# Altium PCB ina226.PcbDoc
Units mm, origin at the board's own origin, x right, y up, seen from the top; angles counter-clockwise.
Board outline 40 x 26 mm, 2 copper layers (Top Layer, Bottom Layer); 18 components, 13 nets, 70 pads, 8 vias.
Unrouted connection lines stored in the file: 2.
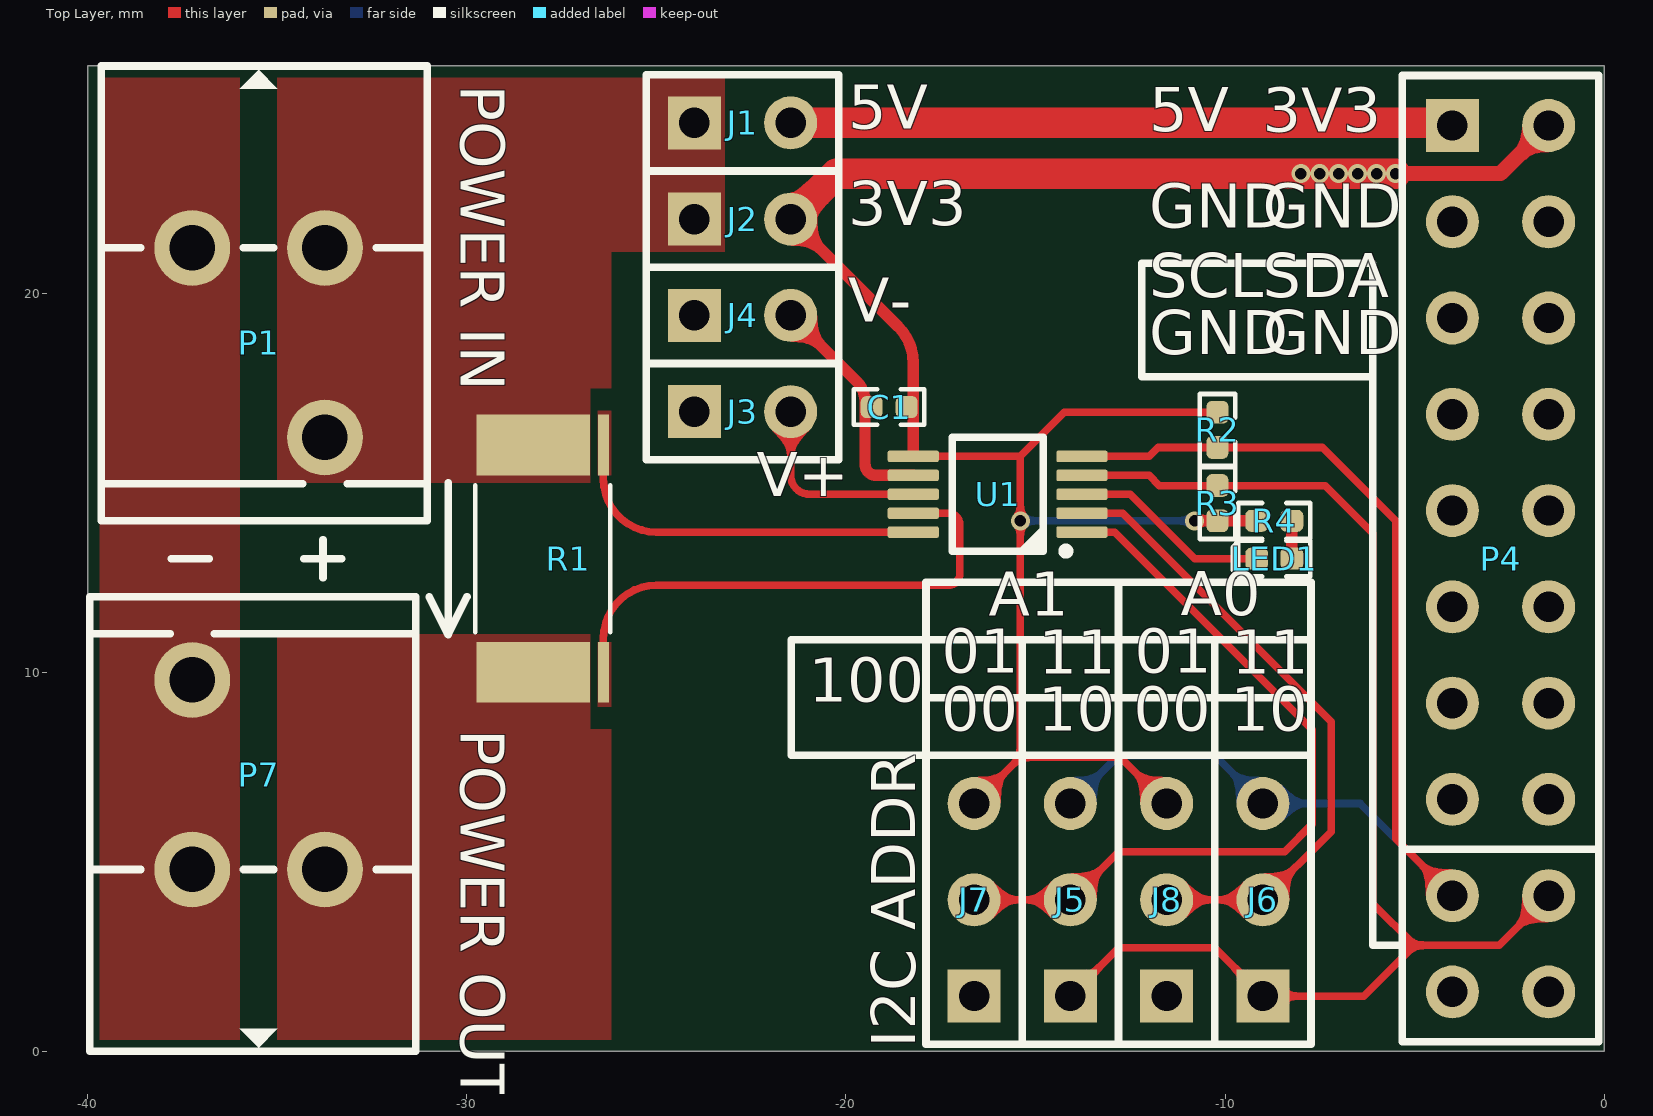
[diagram p0: Top Layer view]
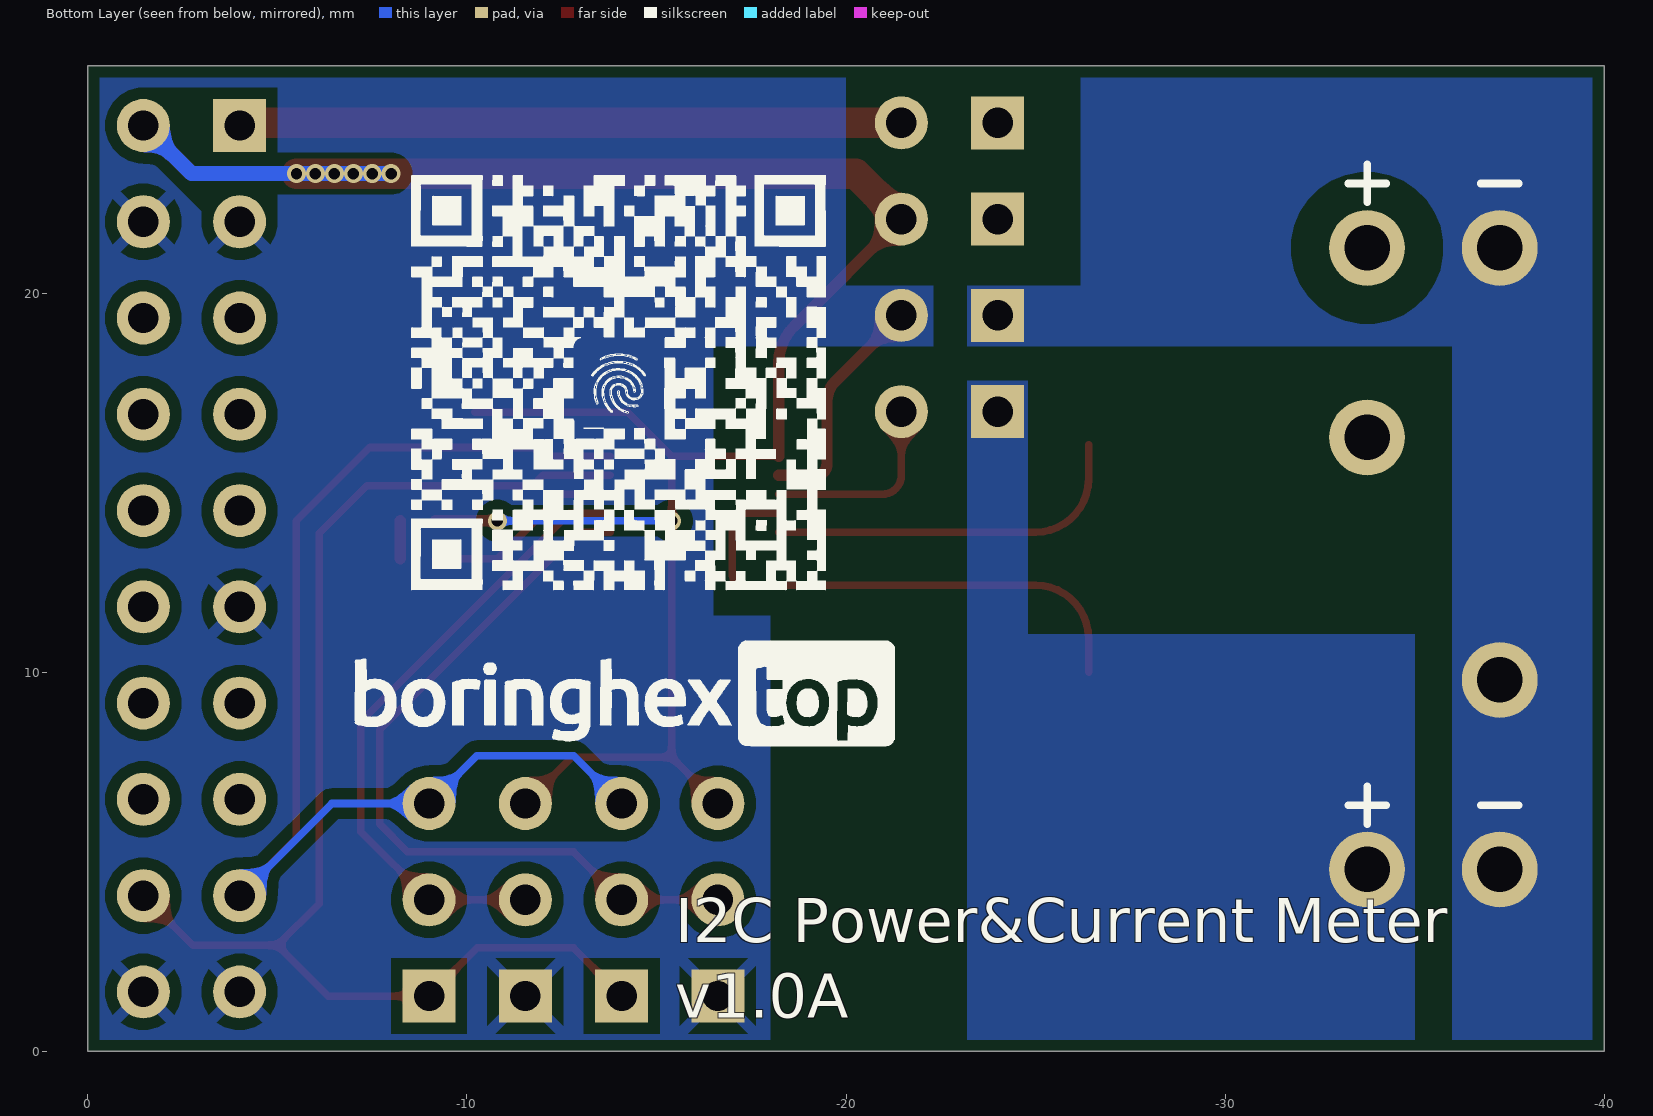
[diagram p1: Bottom Layer view, seen from below]
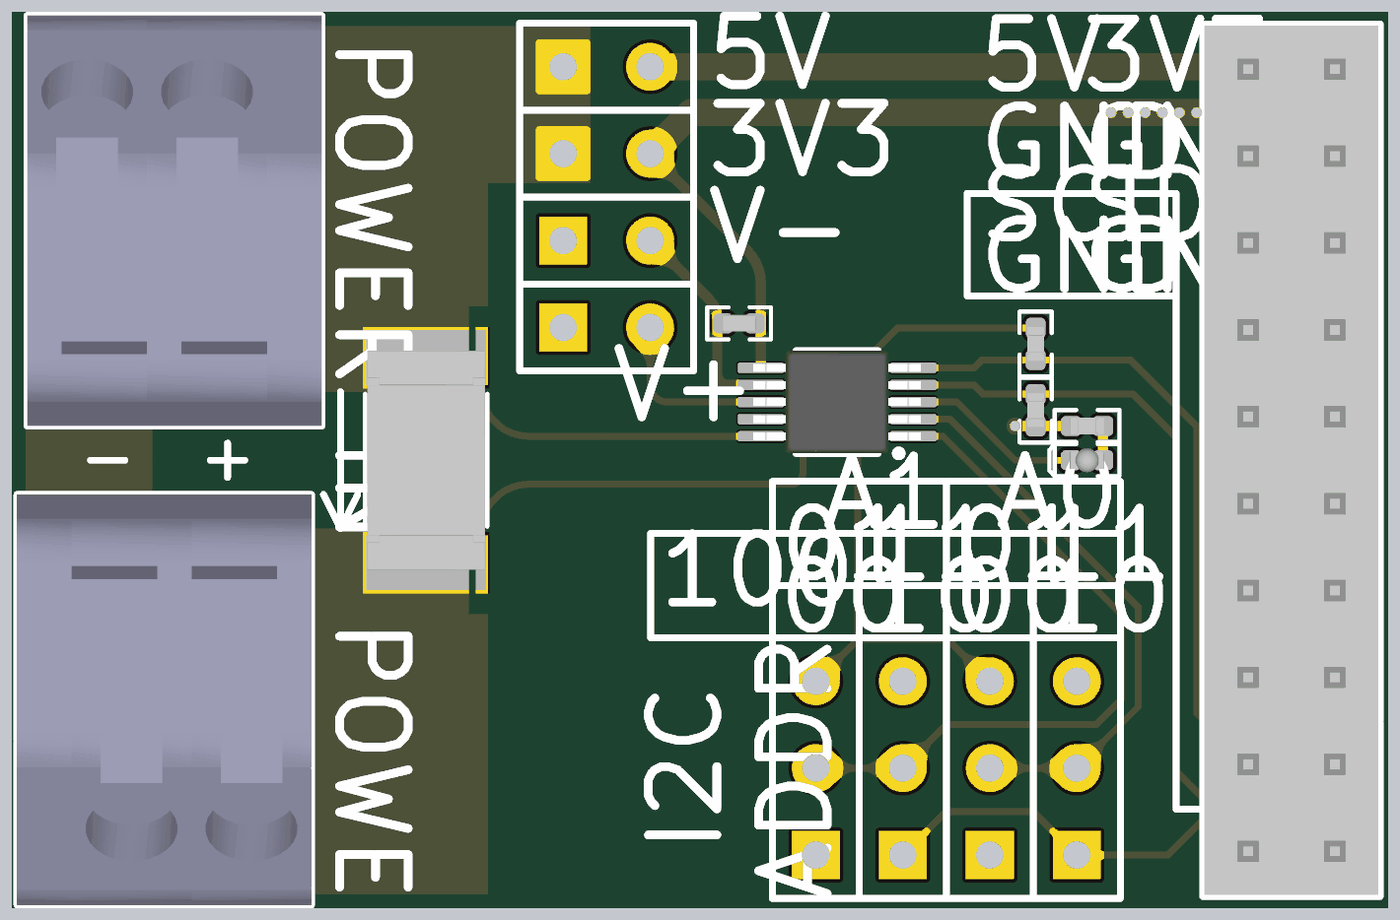
[diagram p2: 3D render of the assembled board from above, using the file's embedded part models]

## Layer stack, top to bottom
Top Solder: solder mask 0.0102, Solder Resist, Dk 3.5
Top Layer: signal copper 0.0356
Dielectric 1: dielectric 0.32, FR-4, Dk 4.8
Bottom Layer: signal copper 0.0356
Bottom Solder: solder mask 0.0102, Solder Resist, Dk 3.5

## Board outline
-40,0 -40,26 0,26 0,0

## Design rules (kind name [scope] priority, off if disabled: settings)
BoardOutlineClearance [All] p1: gap=0.3 ignorepadtopadclearanceinfootprint=FALSE
Clearance Clearance_2 [(ObjectKind = 'Pad') And (Layer = 'MultiLayer') And (Net = 'NetJ1_1') And (Component = 'Free')] p1: gap=1 ignorepadtopadclearanceinfootprint=FALSE
Clearance [All] p2: gap=0.2 ignorepadtopadclearanceinfootprint=FALSE except(0.3: Arc-Fill Arc-Poly Arc-Region Track-Fill Track-Poly Track-Region SMDPad-Fill SMDPad-Poly SMDPad-Region THPad-Fill THPad-Poly THPad-Region Via-Fill Via-Poly Via-Region Fill-Fill Fill-Poly Fill-Region Poly-Poly Poly-Region Region-Region)
PolygonConnect PolygonConnect_1 [(not InNet('GND')) or InComponent('J4')] p1: connectstyle=Direct reliefconductorwidth=0.254 reliefentries=4 polygonreliefangle="90 Angle" airgapwidth=0.254
PolygonConnect [All] p2: thpad.connectstyle=Relief thpad.reliefconductorwidth=0.3 thpad.reliefentries=4 thpad.polygonreliefangle="45 Angle" thpad.airgapwidth=0.3 smdpad.connectstyle=Relief smdpad.reliefconductorwidth=0.3 smdpad.reliefentries=4 smdpad.polygonreliefangle="90 Angle" smdpad.airgapwidth=0.3 via.connectstyle=Direct via.reliefconductorwidth=0.254 via.reliefentries=4 via.polygonreliefangle="90 Angle" via.airgapwidth=0.254
RoutingVias [All] p1: holewidth=0.3 width=0.5 viastyle="Through Hole" minholewidth=0.3 minwidth=0.5 maxholewidth=1.6 maxwidth=2
SolderMaskExpansion [All] p1: expansion=0.102 istentingtop=FALSE
Width [All] p1: maxlimit=10 minlimit=0.15 preferedwidth=0.3
30 further rules are at their usual default settings.

## Components (designator, comment, footprint, x,y, rotation, side; value= is the part's Value field where it differs from the comment)
C1 "100nF" CAPC100X50X55L25N -18.862,17 r0 top
J1 "5V" HDR1X2 -24,24.5 r0 top
J2 "3V3" HDR1X2 -24,21.96 r0 top
J3 "4WIRE VBUS" HDR1X2 -24,16.88 r0 top
J4 "4WIRE GND" HDR1X2 -24,19.42 r0 top
J5 "A1" HDR1X3 -14.08,1.46 r90 top
J6 "A0" HDR1X3 -9,1.46 r90 top
J7 "A1" HDR1X3 -16.62,1.46 r90 top
J8 "A0" HDR1X3 -11.54,1.46 r90 top
LED1 "蓝灯 正贴" LEDC100X50X45L25N -8.7,13 r0 top
P1 "PWR IN" CONN-TH_P3.50_KF250-3.5-2P-1 -35.5,18.7 r180 top
P4 "Header 10X2" HDRV20W63P254_10X2_2540X508H860 -4,24.43 r270 top
P7 "PWR OUT" CONN-TH_P3.50_KF250-3.5-2P-1 -35.5,7.3 r0 top
R1 "20m" RESC620X325X80L80N-K -28,13 r90 top
R2 "4k7" RESC100X50X35L25N -10.2,16.4 r90 top value=1K
R3 "4k7" RESC100X50X35L25N -10.2,14.465 r270 top value=1K
R4 "470" RESC100X50X35L25N -8.7,14 r180 top value=1K
U1 "INA226AIDGST" DGS0010A_N -16,14.7 r90 top

## Footprints (in the part's own frame and the unit in brackets; to place one, negate y for a bottom-side part, rotate by r counter-clockwise, add the part's x,y. Pads: shape width x height; smd on the part's side, far side on the other; paste and mask are expansions set on the pad)
CAPC100X50X55L25N [mm] "Capacitor, Chip; 1.00 mm L X 0.50 mm W X 0.55 mm H body"
  rrect50% 0.575x0.58 smd: 1(-0.462,0) 2(0.462,0)
  silkscreen extent -0.93,-0.47 0.93,0.47, body extent -0.5,-0.25 0.5,0.25, height 0.55
CONN-TH_P3.50_KF250-3.5-2P-1 [mm]
  round 2 hole 1.2: 1(-1.75,2.5) 2(1.75,-2.5)
  silkscreen extent -4.45,-7.3 4.15,4.7, body extent -4.45,-7.3 4.15,4.7, height 13.31
DGS0010A_N [mm] "SOP, 10-Leads, Body 3.1x3.1mm, Pitch 0.5mm, IPC Medium Density"
  rrect33% 0.3x1.35 smd mask+0.05: 1(-1,-2.225) 2(-0.5,-2.225) 3(0,-2.225) 4(0.5,-2.225) 5(1,-2.225) 6(1,2.225) 7(0.5,2.225) 8(0,2.225) 9(-0.5,2.225) 10(-1,2.225)
  silkscreen extent -1.6,-1.9 1.5,1.2, body extent -1.5,-2.45 1.5,2.45, height 0.94
HDR1X2 [mm] "Connector; Header; 2 Position"
  rect 1.4x1.4 hole 0.8: 1(0,0)
  round 1.4 hole 0.8: 2(2.54,0)
  silkscreen extent -1.27,-1.27 3.81,1.27
HDR1X3 [mm] "Connector; Header; 3 Position"
  rect 1.4x1.4 hole 0.8: 1(0,0)
  round 1.4 hole 0.8: 2(2.54,0) 3(5.08,0)
  silkscreen extent -1.27,-1.27 6.35,1.27
HDRV20W63P254_10X2_2540X508H860 [mm] "Header, Vertical Non-Shrouded, 2.54 mm pitch; 0.68 mm lead width, 20 pin, 2 rows, 25.40 mm L X 5.08 mm W X 8.70 mm H body"
  rect 1.4x1.4 hole 0.8 paste-1.65: 1(0,0)
  round 1.4 hole 0.8 paste-1.65: 2(0,2.54) 3(2.54,0) 4(2.54,2.54) 5(5.08,0) 6(5.08,2.54) 7(7.62,0) 8(7.62,2.54) 9(10.16,0) 10(10.16,2.54) 11(12.7,0) 12(12.7,2.54) 13(15.24,0) 14(15.24,2.54) 15(17.78,0) 16(17.78,2.54) 17(20.32,0) 18(20.32,2.54) 19(22.86,0) 20(22.86,2.54)
  silkscreen extent -1.32,-1.32 24.18,3.86, body extent -1.27,-1.27 24.13,3.81, height 8.7
LEDC100X50X45L25N [mm] "LED, Chip; 1.00 mm L X 0.50 mm W X 0.45 mm H body"
  rrect50% 0.6x0.58 smd: A(0.465,0) C(-0.465,0)
  silkscreen extent -1.1,-0.47 0.94,0.47, body extent -0.5,-0.35 0.5,0.35, height 0.8
RESC100X50X35L25N [mm] "Resistor, Chip; 1.00 mm L X 0.50 mm W X 0.35 mm H body"
  rrect50% 0.6x0.58 smd: 1(-0.465,0) 2(0.465,0)
  silkscreen extent -0.94,-0.47 0.94,0.47, body extent -0.5,-0.25 0.5,0.25, height 0.35
RESC620X325X80L80N-K [mm] "Resistor, Chip; 6.20 mm L X 3.25 mm W X 0.80 mm H body"
  rect 1.6x0.3 smd mask+0.102: 1(-3,-1.6) 2(3,-1.6)
  rect 1.6x3 smd mask+0.102: 1(-3,0.25) 2(3,0.25)
  silkscreen extent -1.94,-1.79 1.94,1.79, body extent -3.2,-1.73 3.2,1.73, height 0.8

## Part data
C1: library part "Cap Semi", "Capacitor (Semiconductor SIM Model)", LatestRevisionDate=29-May-2009, LatestRevisionNote="IPC-7351 Footprint Added.", PackageDescription="Chip Capacitor", PackageReference=C1206, Published=8-Jun-2000, Publisher="Altium Limited"
J1 J2 J3 J4 P1 P7: library part "Header 2", "Header, 2-Pin", LatestRevisionDate=17-Jul-2002, LatestRevisionNote="Re-released for DXP Platform.", Publisher="Altium Limited"
J5 J6 J7 J8: library part "Header 3", "Header, 3-Pin", LatestRevisionDate=17-Jul-2002, LatestRevisionNote="Re-released for DXP Platform.", Publisher="Altium Limited"
LED1: library part LED-SMD, "贴片LED", 编号=C965795
P4: "Header, 10-Pin, Dual row", 编号=C5116480
R1 R2 R3 R4: library part Res1, "Resistor", PackageDescription="Axial Device, Thru-Hole; 2 Leads; 0.3 in Pin Spacing"
  R2 R3 R4: LatestRevisionDate=17-Jul-2002, LatestRevisionNote="Re-released for DXP Platform.", PackageReference=AXIAL-0.3, Published=8-Jun-2000, Publisher="Altium Limited"
U1: library part CMP-0704-00057-2, "High-Side Measurement, Bi-Directional Current / Power Monitor with I2C Interface, 2.7 to 5.5 V, -40 to 125 degC, 10-pin SOP (DGS10), Green (RoHS & no Sb/Br)", Quiescent Current (+/-)(Typ)(mA)=0.33, Rating=Catalog, CMRR(Min)(dB)=126, Code_JEDEC=MO-153, Common Mode Range(Max)(V)=36, Common Mode Range(Min)(V)=0, ComponentLink1Description="Manufacturer URL", ComponentLink1URL=http://www.ti.com/, ComponentLink2Description=Datasheet, ComponentLink2URL=http://www.ti.com/general/docs/lit/getliterature.tsp?genericPartNumber=INA226&fileType=pdf, ComponentLink3Description="Package Specification", ComponentLink3URL=http://www.ti.com/lit/ml/mpds035b/mpds035b.pdf, DatasheetVersion=SBOS547, Eco-Plan="Green (RoHS & no Sb/Br)", Gain(V/V)=1, Input Offset (+/-)(Max)(uV)=10, Input Offset Drift (+/-)(Max)(uV/Degrees Celsius)=0.1, Mounting Technology="Surface Mount", PackageDescription="10-Pin Plastic Small Outline, Body 3 x 3 mm, Pitch 0.5 mm", PackageReference=DGS0010A, PackageVersion="4073272/C, 02/2004", PartNumber=INA226AIDGST, Small-Signal Bandwidth(Typ)(MHz)=0.007, SubFamily="Current Shunt Monitor", Vs(Max)(V)=5.5, Vs(Min)(V)=2.7

## Free pads (board coordinates)
  round 2 hole 1.2: 15(-37.25,4.8) 16(-33.75,21.2)

## Via types
v1: diameter 0.5, hole 0.3, Top Layer to Bottom Layer, tented both sides, 8 vias

## Nets (pads, with @x,y where several pads share a name; then routed paths per layer and width w, separated by ;. In a path a pad name is that pad's centre, name@x,y a point inside that pad or via, vN(x,y) a via of type N, cw(c..) or ccw(c..) an arc to the next point about the centre after c; other vN are vias at no path point)
3V3: C1.2 J2.2 J7.3 J8.3 P4.2 R2.2 R3.2 R4.2 U1.6 | length 66.4
  Top Layer w0.2: U1.6 -15.4,15.7 ; J7.3 -15.4,7.76 ; J8.3 -12.76,7.76 -15.4,7.76 ; R2.2 -14.235,16.865 -15.4,15.7 ; -15.4,7.76 v1(-15.4,14) -15.4,15.7
  Top Layer w0.3: J2.2 -18.62,19.12 ; -18.62,19.12 cw(c-19.569,18.168) -18.225,18.168 -18.225,17 U1.6 ; v1(-10.8,14) R3.2 R4.2
  Top Layer w0.4: v1(-7.5,23.16) v1(-7,23.16) v1(-6.5,23.16) v1(-6,23.16) v1(-5.5,23.16) -2.73,23.16 P4.2
  Top Layer w0.8: J2.2 -20.26,23.16 v1(-8,23.16) v1(-7.5,23.16) v1(-7,23.16) v1(-6.5,23.16) v1(-6,23.16) v1(-5.5,23.16)
  Bottom Layer w0.2: v1(-15.4,14) v1(-10.8,14)
  Bottom Layer w0.4: v1(-8,23.16) v1(-7.5,23.16) v1(-7,23.16) v1(-6.5,23.16) v1(-6,23.16) v1(-5.5,23.16) -2.73,23.16 P4.2
5V: J1.2 P4.1 | length 17.5
  Top Layer w0.8: J1.2 P4.1@-4,24.5
  Top Layer w1: P4.1 P4.1@-4,24.5
GND: C1.1 J4.2 J7.1 J8.1 P4.3 P4.4 P4.11 P4.19 P4.20 U1.7 | length 6.1
  Top Layer w0.3: J4.2 -19.714,17.674 cw(c-20.228,17.159) C1.1@-19.5,17.158 ; C1.1@-19.5,17.157 -19.5,15.5 ccw(c-19.2,15.5) -19.2,15.2 U1.7
NetJ1_1: J1.1 J2.1 P1.1 pad.16 R1.2 U1.10 | length 9.9
  Top Layer w0.2: R1.2@-26.4,16 -26.4,15.1 ccw(c-25,15.1) -25,13.7 U1.10
NetJ3_1: J3.1 P7.2 R1.1 U1.9 | length 14
  Top Layer w0.2: R1.1@-26.4,10 -26.4,10.9 cw(c-25,10.9) -25,12.3 -17.3,12.3 ccw(c-17.3,12.6) -17,12.6 -17,13.9 ccw(c-17.3,13.9) -17.3,14.2 U1.9
NetJ3_2: J3.2 U1.8 | length 5.2
  Top Layer w0.2: J3.2 -21.46,15.2 ccw(c-20.96,15.2) -20.96,14.7 U1.8
NetJ4_1: J4.1 P1.2 P7.1 pad.15
NetJ5_2: J5.2 J7.2 U1.1 | length 20.5
  Top Layer w0.2: J7.2 J5.2 -12.81,5.27 -8.43,5.27 -7.7,6 -7.7,8.49 -12.91,13.7 U1.1
NetJ6_2: J6.2 J8.2 U1.2 | length 16.8
  Top Layer w0.2: U1.2 -12.7,14.2 -7.2,8.7 -7.2,5.8 J6.2 J8.2
NetLED1_A: LED1.A R4.1 | length 1
  Top Layer w0.3: LED1.A R4.1
NetLED1_C: LED1.C U1.3 | length 5.3
  Top Layer w0.2: U1.3 -12.5,14.7 -10.8,13 LED1.C
SCL: J5.3 J6.3 P4.17 R2.1 U1.5 | length 31.8
  Top Layer w0.2: U1.5 -12,15.7 -11.765,15.935 R2.1 -7.435,15.935 -5.5,14 -5.5,5.61 P4.17
  Bottom Layer w0.2: J5.3 -12.82,7.8 -10.26,7.8 J6.3 -6.43,6.54 P4.17
SDA: J5.1 J6.1 P4.18 R3.1 U1.4 | length 34.4
  Top Layer w0.2: J5.1 -12.81,2.73 -10.27,2.73 J6.1 -6.34,1.46 -5,2.8 ; U1.4 -12,15.2 -11.73,14.93 R3.1 -7.36,14.93 -6.1,13.67 -6.1,3.9 -5,2.8 ; P4.18 -2.77,2.8 -5,2.8
pads on no net: P4.5 P4.6 P4.7 P4.8 P4.9 P4.10 P4.12 P4.13 P4.14 P4.15 P4.16

## Polygon pours and split planes (outlines as drawn)
NetJ4_1 on Top Layer "NONET_L-01_P-001" (solid, remove dead copper, pour order 4): -40,26 -36,26 -36,0 -40,0
NetJ3_1 on Top Layer "NONET_L-01_P-001" (solid, remove dead copper, pour order 1): -35,11 -26.2,11 -26.2,4.9 -26.2,0 -35,0
NetJ1_1 on Top Layer "NONET_L-01_P-001" (solid, remove dead copper, pour order 0): -35,15 -26.2,15 -26.2,21.1 -23.2,21.1 -23.2,26 -35,26
GND on Bottom Layer "NONET_L-01_P-001" (solid, remove dead copper, pour order 5): -22.3,20.2 -22.3,18.6 -16.5,18.6 -16.5,11.5 -18,11.5 -18,0 0,0 0,26 -20,26 -20,20.2
NetJ4_1 on Bottom Layer "NONET_L-01_P-001" (solid, remove dead copper, pour order 3): -40,0 -36,0 -36,18.6 -23.2,18.6 -23.2,20.2 -26.2,20.2 -26.2,26 -40,26
NetJ3_1 on Bottom Layer "NONET_L-01_P-001" (solid, remove dead copper, pour order 2): -24.8,17.7 -24.8,11 -35,11 -35,8.85 -35,0 -23.2,0 -23.2,17.7

## Other copper
Top Layer:
  pour cut-out: -26.55,10.8 -26.2,10.8 -26.2,11 -26.75,11 -26.75,8.5 -26.2,8.5 -26.2,9.1 -26.55,9.1 -26.55,9.2
  pour cut-out: -26.55,15.2 -26.2,15.2 -26.2,15 -26.75,15 -26.75,17.5 -26.2,17.5 -26.2,16.9 -26.55,16.9 -26.55,16.8
Bottom Layer:
  pour cut-out: -7.928,23.71 -5,23.71 -5,25.43 -1.46,25.43 -1.46,23.709 -3,22.169 -3,21.89 -5,21.89 -5,22.61 -7.928,22.61
  pour cut-out: -4.132,5.11 -5,5.11 -5,4.242 -4.132,4.242
  pour cut-out: -9,7.54 -9,5.54 -14.08,5.54 -14.08,7.54

## Silkscreen, mask and mechanical layers (free items; w line width, h text height)
Top Overlay:
  lines w0.2: -37.8,13 -36.8,13 ; -34.3,13 -33.3,13 ; -33.8,12.5 -33.8,13.5 ; -31,12 -30.5,11 ; -30.5,15 -30.5,11 ; -30,12 -30.5,11 ; -17.89,9.334 -7.73,9.334 ; -15.35,7.81 -15.35,10.858 ; -12.81,7.81 -12.81,12.382 ; -10.27,7.81 -10.27,10.858 ; -7.73,7.81 -7.73,12.382 -17.89,12.382 -17.89,7.81 -21.446,7.81 -21.446,10.858 -17.89,10.858 -7.73,10.858 ; -5.32,2.8 -6.1,2.8 -6.1,17.8 ; -5.32,5.33 -0.14,5.33 ; -6.1,17.8 -6.1,20.8 -12.2,20.8 -12.2,17.8 -6.1,17.8
  text "POWER IN" at -30.545,25.5 h2 r270
  text "5V" at -19.936,23.963 h2
  text "5V" at -12,23.893 h2
  text "3V3" at -9,23.885 h2
  text "3V3" at -19.936,21.415 h2
  text "GND" at -12,21.345 h2
  text "GND" at -9,21.345 h2
  text "SCL" at -12,19.515 h2
  text "SDA" at -9,19.515 h2
  text "V-" at -19.936,18.876 h2
  text "GND" at -12,18.015 h2
  text "GND" at -9,18.015 h2
  text "V+" at -22.361,14.268 h2
  text "A0" at -11.167,11.127 h2
  text "A1" at -16.23,11.112 h2
  text "01" at -17.467,9.603 h2
  text "01" at -12.387,9.603 h2
  text "11" at -14.908,9.588 h2
  text "11" at -9.828,9.588 h2
  text "100" at -20.982,8.841 h2
  text "POWER OUT" at -30.545,8.5 h2 r270
  text "00" at -17.484,8.079 h2
  text "10" at -14.925,8.079 h2
  text "00" at -12.404,8.079 h2
  text "10" at -9.845,8.079 h2
  text "I2C ADDR" at -17.793,0.1 h2 r90
Bottom Overlay:
  drawing of 46 lines, arcs and shapes, not listed
  text "I2C Power&Current Meter / v1.0A" at -15.5,0.5 h2
Board Shape:
  the board outline again, w0.2